# EAGLE board StripController1 (EAGLE 6.4)
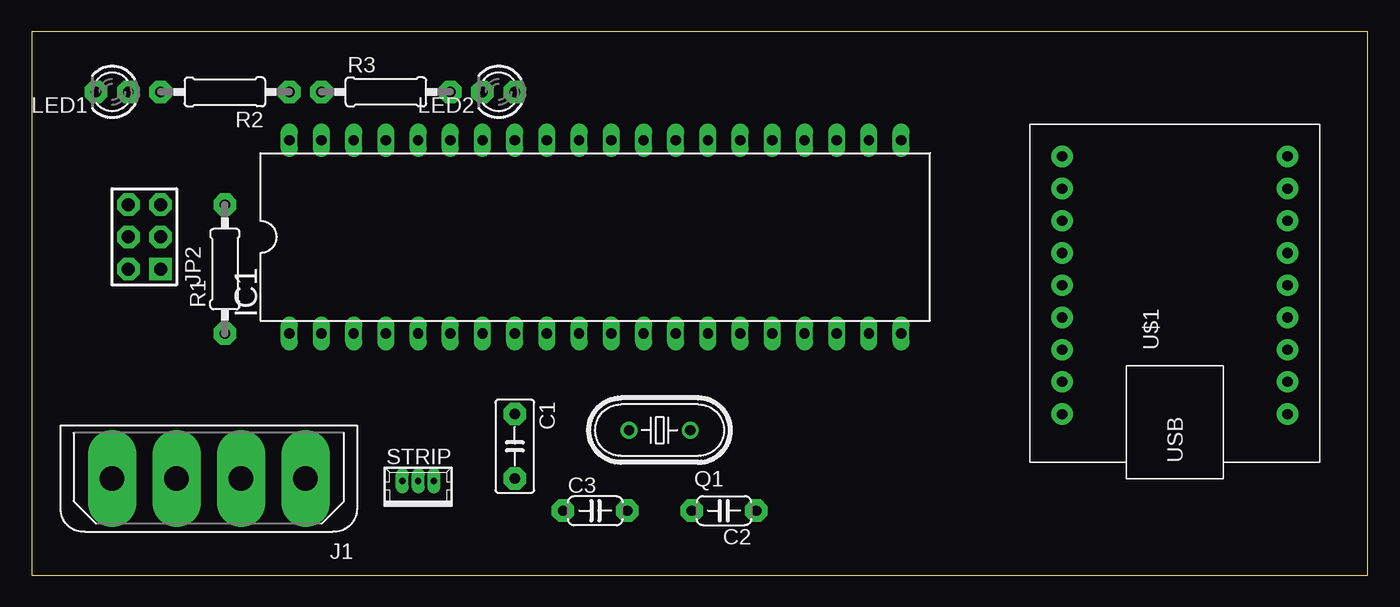
[diagram p0: board, top side]
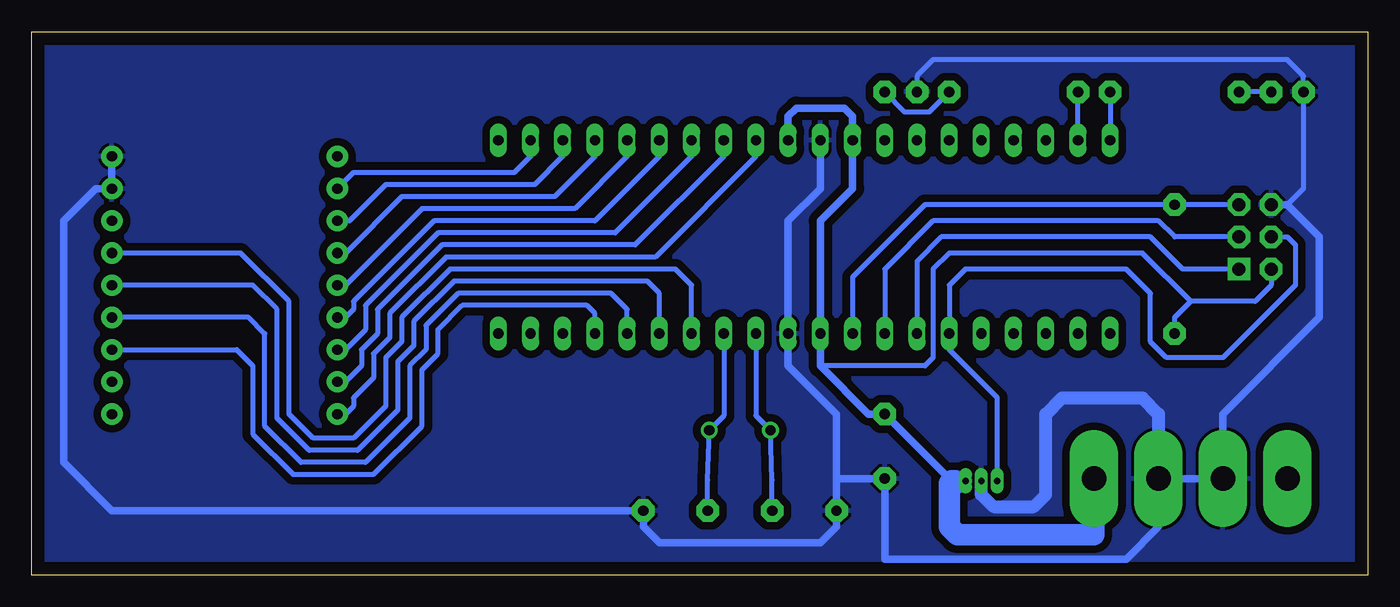
[diagram p1: board, bottom side, seen from below]

Size 105.39 x 42.85 mm. Coordinates in mm from the lower left corner, seen from the top.
Outline: 0,0 105.39,0 105.39,42.85 0,42.85 0,0
Copper layers (1*16): Top 0.035mm / dielectric 1.5mm / Bottom 0.035mm
Design rules "default": minimum track width 10mil, minimum drill 24mil, track to track 8mil, track to pad 8mil, pad to pad 8mil, via to via 8mil, smd to smd 8mil, copper to edge 40mil, drill to drill 8mil, minimum pad ring 10mil, minimum via ring 8mil, stop-mask expansion 4mil, vias tented up to drill 0mil, thermal gap 10mil

## Footprints (pad centres in the part's own frame; a part is rotated, then mirrored left to right if it is on the bottom)
C050-030X075 = drill 0.813 pad 1.778 octagon: 1 -2.54,0; 2 2.54,0
C050-024X044 = drill 0.813 pad 1.778 octagon: 1 -2.54,0; 2 2.54,0
DIL40 = drill 0.813 long: 1 -24.13,-7.62; 2 -21.59,-7.62; 3 -19.05,-7.62; 4 -16.51,-7.62; 5 -13.97,-7.62; 6 -11.43,-7.62; 7 -8.89,-7.62; 8 -6.35,-7.62; 9 -3.81,-7.62; 10 -1.27,-7.62; 11 1.27,-7.62; 12 3.81,-7.62; 13 6.35,-7.62; 14 8.89,-7.62; 15 11.43,-7.62; 16 13.97,-7.62; 17 16.51,-7.62; 18 19.05,-7.62; 19 21.59,-7.62; 20 24.13,-7.62; 21 24.13,7.62; 22 21.59,7.62; 23 19.05,7.62; 24 16.51,7.62; 25 13.97,7.62; 26 11.43,7.62; 27 8.89,7.62; 28 6.35,7.62; 29 3.81,7.62; 30 1.27,7.62; 31 -1.27,7.62; 32 -3.81,7.62; 33 -6.35,7.62; 34 -8.89,7.62; 35 -11.43,7.62; 36 -13.97,7.62; 37 -16.51,7.62; 38 -19.05,7.62; 39 -21.59,7.62; 40 -24.13,7.62
FLOPPY-4 = drill 1.93 pad 3.81 long: 1 7.62,0; 2 2.54,0; 3 -2.54,0; 4 -7.62,0
AVR-ISP-6 = drill 1.016 pad 1.778 square: 1 -2.54,-1.27 | drill 1.016 pad 1.778 octagon: 2 -2.54,1.27; 3 0,-1.27; 4 0,1.27; 5 2.54,-1.27; 6 2.54,1.27
LED3MM = drill 0.813 pad 1.778 octagon: A -1.27,0; K 1.27,0
HC49U70 = drill 0.813: 1 -2.413,0; 2 2.413,0
0207/10 = drill 0.813 pad 1.778 octagon: 1 -5.08,0; 2 5.08,0
53047-03 = drill 0.5 pad 0.698 long: 1 1.25,0.45; 2 0,0.45; 3 -1.25,0.45
SPARKFUN_FT245RL_BOARD = drill 0.8 pad 1.676: D0 7.62,8.89; D1 5.08,8.89; D2 2.54,8.89; D3 0,8.89; D4 -2.54,8.89; D5 -5.08,8.89; D6 -7.62,8.89; D7 -10.16,8.89; GND1 7.62,-8.89; GND2 10.16,-8.89; PWEN 5.08,-8.89; RD 2.54,-8.89; RXF -2.54,-8.89; TXE -5.08,-8.89; V3.3 -7.62,-8.89; VCCIO 10.16,8.89; VUSB -10.16,-8.89; WR 0,-8.89

## Placement (x,y rotation side)
C1  100nF  [C050-030X075]  38.1,10.16 270 top
C2  22pf  [C050-024X044]  54.61,5.08 180 top
C3  22pf  [C050-024X044]  44.45,5.08 0 top
IC1  MEGA164P/324P/644P-PU  [DIL40]  44.45,26.67 0 top
J1  [FLOPPY-4]  13.97,7.62 180 top
JP2  AVR-ISP-6  [AVR-ISP-6]  8.89,26.67 90 top
LED1  [LED3MM]  6.35,38.1 180 top
LED2  [LED3MM]  36.83,38.1 180 top
Q1  20Mhz  [HC49U70]  49.53,11.43 180 top
R1  10k  [0207/10]  15.24,24.13 90 top
R2  330  [0207/10]  15.24,38.1 180 top
R3  330  [0207/10]  27.94,38.1 0 top
STRIP  53047-03  [53047-03]  30.48,6.99 0 top
U$1  FT245RL_BREAKOUTBOARD  [SPARKFUN_FT245RL_BOARD]  90.17,22.86 90 top

## Library data of the parts
C1-C3 R1-R3 = 0_Standard-Parts
IC1 JP2 = 0_avr
J1 = 0_con Tom
LED1 LED2 = 0_Led
Q1 = crystal
STRIP = con-molex; MPN: 530470310; OC_FARNELL: 9732853; OC_NEWARK: 14R5412
U$1 = Sparkfun

## Nets
+5V: C1.1 IC1.10 IC1.30 IC1.32 J1.4 JP2.2 R1.1 STRIP.1
GND: C1.2 C2.1 C3.1 IC1.11 IC1.31 J1.2 J1.3 JP2.6 LED1.K LED2.K STRIP.2 U$1.GND1 U$1.GND2
N$1: IC1.8 JP2.3
N$2: IC1.7 JP2.1
N$3: IC1.40 R2.1
N$4: IC1.9 JP2.5 R1.2
N$5: IC1.6 JP2.4 STRIP.3
N$6: IC1.39 R3.1
N$7: IC1.22 U$1.D0
N$8: C2.2 IC1.13 Q1.1
N$9: C3.2 IC1.12 Q1.2
N$10: IC1.23 U$1.D1
N$11: IC1.24 U$1.D2
N$12: IC1.25 U$1.D3
N$13: IC1.26 U$1.D4
N$14: IC1.27 U$1.D5
N$15: IC1.28 U$1.D6
N$16: IC1.29 U$1.D7
N$17: IC1.17 U$1.TXE
N$18: IC1.16 U$1.RXF
N$19: IC1.14 U$1.RD
N$20: IC1.15 U$1.WR
N$21: LED1.A R2.2
N$22: LED2.A R3.2
VCCIO: U$1.VCCIO

## Tracks (layer width: path | path; a pad name or v marks a point on that pad's centre or on a via)
+5V
  Bottom 0.406: JP2.2 7.62,22.86 8.89,21.59 13.97,21.59 | 13.97,21.59 17.78,25.4 33.02,25.4 34.29,24.13 34.29,17.14 34.92,16.51 43.18,16.51 | R1.1 15.24,20.32 13.97,21.59
  Bottom 0.61: IC1.30 45.72,36.2 45.09,36.83 41.27,36.83 40.64,36.2 IC1.32 40.64,30.48 43.18,27.94 IC1.10 43.18,16.51 39.37,12.7 C1.1 32.84,7.43
  Bottom 1.016: 32.38,7.3 31.86,7.3 STRIP.1
  Bottom 1.676: J1.4 21.59,3.17 32.38,3.17 33.02,3.81 33.02,7.25 32.84,7.43 32.52,7.43 32.38,7.3
GND
  Bottom 0.406: LED2.K 35.56,39.37 34.29,40.64 6.35,40.64 5.08,39.37 LED1.K 5.08,30.48 6.35,29.21
  Bottom 0.61: IC1.31 43.18,30.48 45.72,27.94 IC1.11 45.72,16.51 41.91,12.7 41.91,7.62 | 41.91,7.62 C3.1 41.91,3.81 43.18,2.54 55.88,2.54 57.15,3.81 C2.1 99.06,5.08 102.87,8.89 102.87,27.94 100.33,30.48 U$1.GND1 U$1.GND2 | 41.91,7.62 C1.2 38.1,1.27 19.05,1.27 16.51,3.81 J1.3 J1.2 11.43,12.7 3.81,20.32 3.81,26.67 6.35,29.21 JP2.6
  Bottom 1.016: J1.3 16.51,12.7 17.78,13.97 24.13,13.97 25.4,12.7 25.4,6.35 26.35,5.4 29.53,5.4 30.48,6.35 STRIP.2
  pour Bottom (isolate 0.61): 0,0 105.41,0 105.41,42.55 0,42.55
N$1
  Bottom 0.406: JP2.3 15.24,26.67 16.51,27.94 34.29,27.94 38.1,24.13 IC1.8
N$2
  Bottom 0.406: JP2.1 14.61,24.13 17.14,26.67 33.66,26.67 35.56,24.77 IC1.7
N$3
  Bottom 0.406: R2.1 IC1.40
N$4
  Bottom 0.406: JP2.5 R1.2 34.92,29.21 40.64,23.5 IC1.9
N$5
  Bottom 0.406: JP2.4 6.35,26.67 5.71,26.04 5.71,22.86 11.43,17.14 15.88,17.14 17.14,18.41 17.14,22.23 19.05,24.13 31.75,24.13 33.02,22.86 IC1.6 33.02,17.78 29.23,13.99 STRIP.3
N$6
  Bottom 0.406: IC1.39 R3.1
N$7
  Bottom 0.406: IC1.22 66.04,33.02 67.31,31.75 80.01,31.75 U$1.D0
N$8
  Bottom 0.406: IC1.13 50.8,12.57 Q1.1 52.07,7.49 C2.2
N$9
  Bottom 0.406: IC1.12 48.26,12.57 Q1.2 46.99,7.49 C3.2
N$10
  Bottom 0.406: IC1.23 63.5,33.02 65.72,30.8 77.47,30.8 80.33,27.94 U$1.D1
N$11
  Bottom 0.406: IC1.24 60.96,33.02 64.14,29.84 76.2,29.84 80.64,25.4 U$1.D2
N$12
  Bottom 0.406: IC1.25 58.42,33.02 62.55,28.89 74.61,28.89 80.64,22.86 U$1.D3
N$13
  Bottom 0.406: IC1.26 55.88,33.02 60.96,27.94 73.66,27.94 80.01,21.59 80.01,20.95 80.64,20.32 U$1.D4
N$14
  Bottom 0.406: IC1.27 53.34,33.02 59.37,26.99 73.34,26.99 79.06,21.27 79.06,19.37 80.64,17.78 U$1.D5
N$15
  Bottom 0.406: IC1.28 50.8,33.02 57.78,26.04 73.03,26.04 78.11,20.95 78.11,19.05 79.38,17.78 79.38,16.51 80.64,15.24 U$1.D6
N$16
  Bottom 0.406: IC1.29 48.26,33.02 56.2,25.08 72.71,25.08 77.15,20.64 77.15,18.73 78.42,17.46 78.42,15.56 80.01,13.97 80.01,13.34 80.64,12.7 U$1.D7
N$17
  Bottom 0.406: IC1.17 60.96,20.64 61.59,21.27 71.44,21.27 73.34,19.37 73.34,17.46 74.61,16.19 74.61,11.75 78.42,7.94 84.77,7.94 87.95,11.11 87.95,16.51 89.22,17.78 U$1.TXE
N$18
  Bottom 0.406: IC1.16 58.42,20.95 59.69,22.23 71.75,22.23 74.3,19.68 74.3,17.78 75.56,16.51 75.56,12.38 79.06,8.89 84.14,8.89 87,11.75 87,19.05 88.27,20.32 U$1.RXF
N$19
  Bottom 0.406: IC1.14 53.34,22.86 54.61,24.13 72.39,24.13 76.2,20.32 76.2,18.41 77.47,17.14 77.47,13.34 80.01,10.79 83.19,10.79 85.09,12.7 85.09,21.59 88.9,25.4 U$1.RD
N$20
  Bottom 0.406: IC1.15 55.88,22.23 56.83,23.18 72.07,23.18 75.25,20 75.25,18.1 76.52,16.83 76.52,13.02 79.69,9.84 83.5,9.84 86.04,12.38 86.04,20.95 87.95,22.86 U$1.WR
N$21
  Bottom 0.406: LED1.A R2.2
N$22
  Bottom 0.406: R3.2 34.61,36.51 36.51,36.51 LED2.A